# EAGLE board PIC32MX250F128B (EAGLE 5.12)
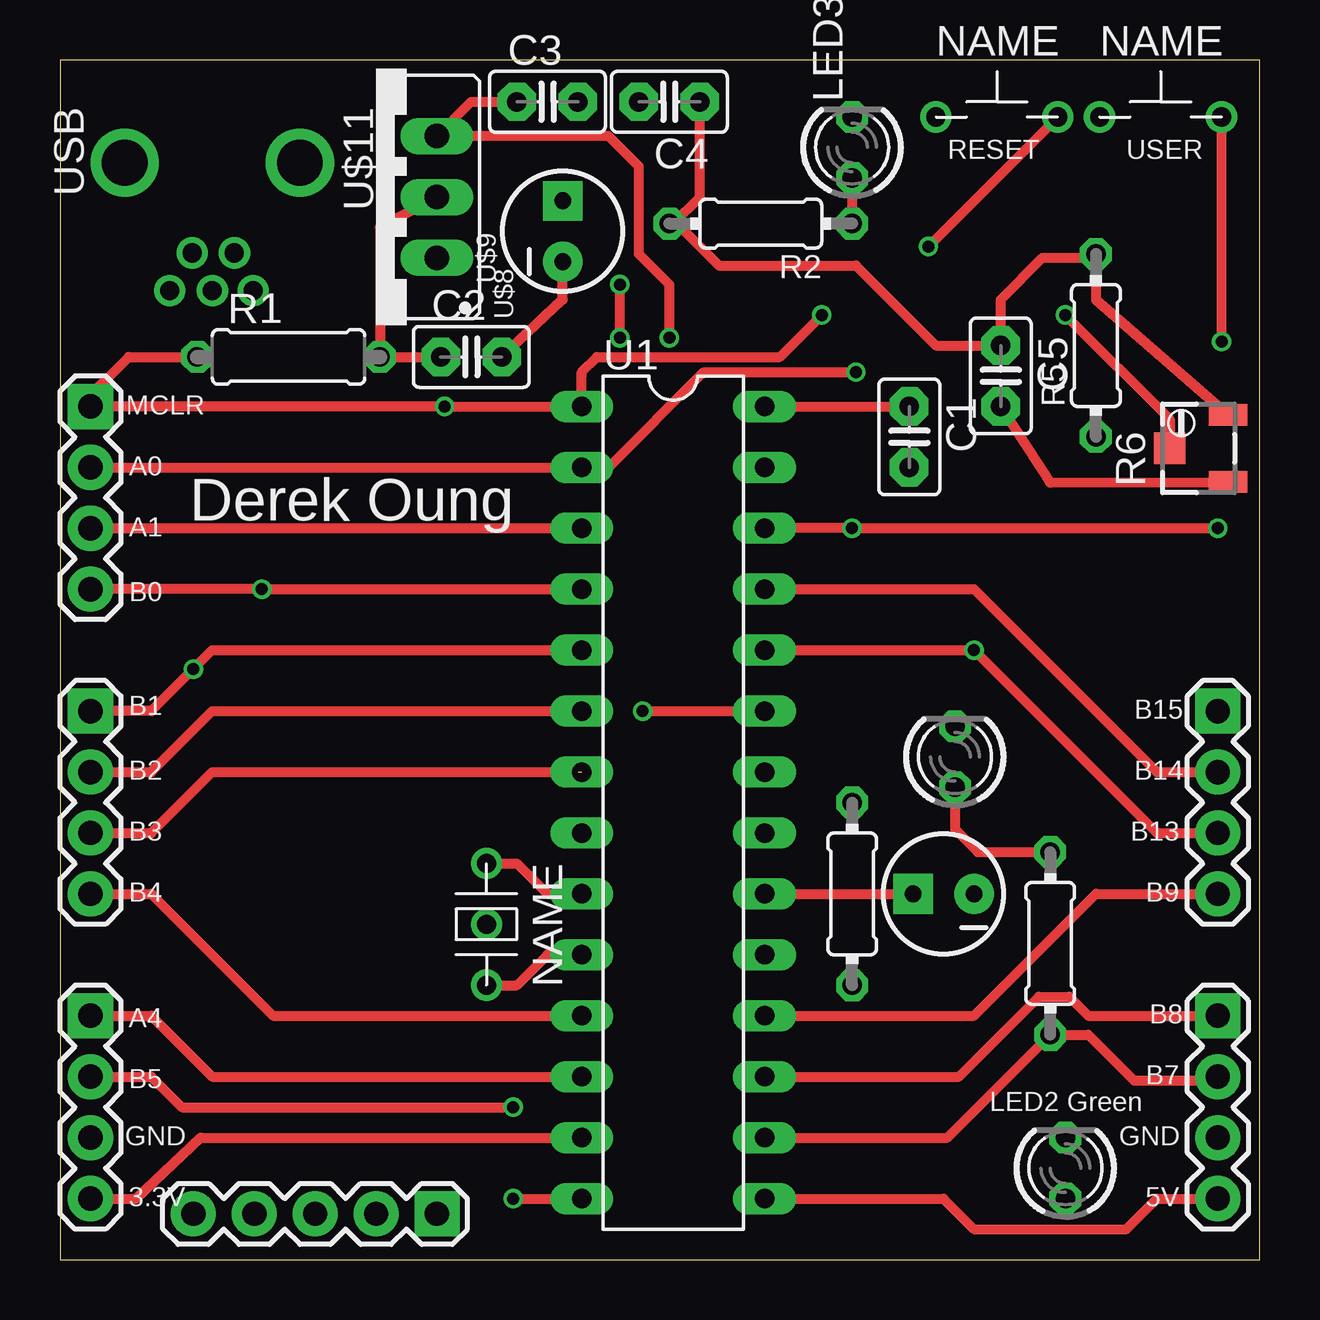
[diagram p0: board, top side]
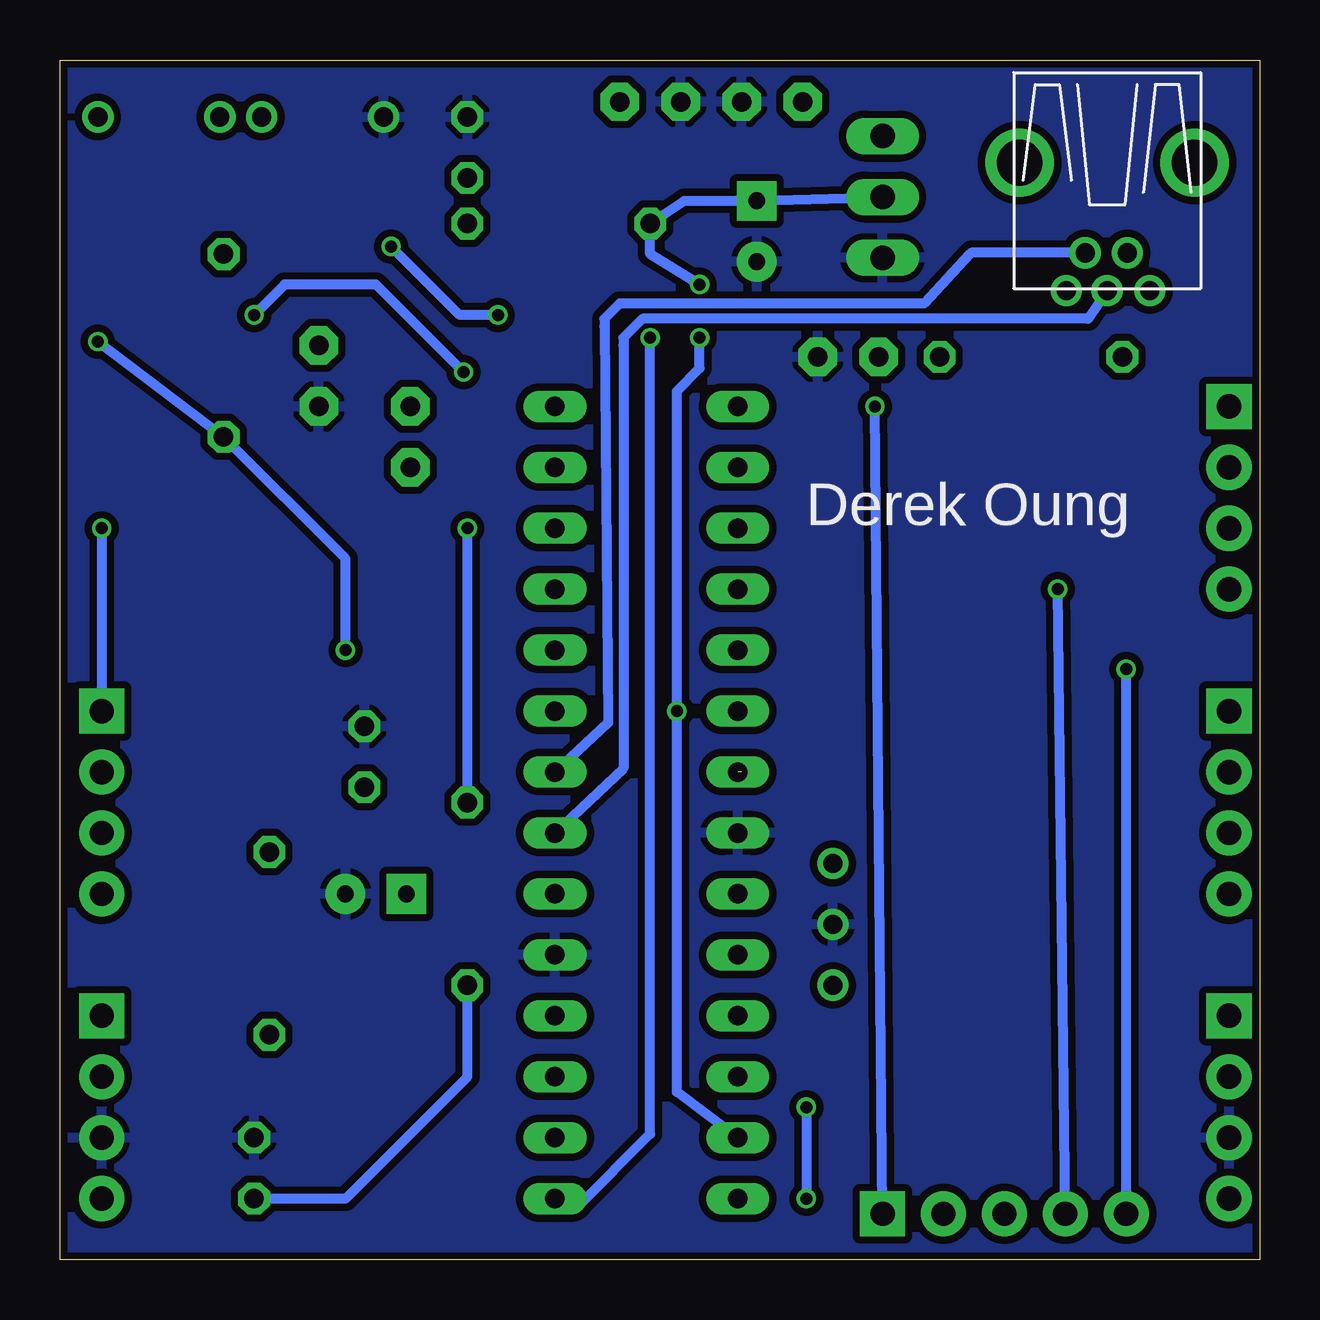
[diagram p1: board, bottom side, seen from below]

Size 50 x 50 mm. Coordinates in mm from the lower left corner, seen from the top.
Outline: 0,0 50,0 50,50 0,50 0,0
Copper layers (1*16): Top 0.035mm / dielectric 1.5mm / Bottom 0.035mm
Design rules "SeeedStudio_2layer_DRU_no_angle_20140221": minimum track width 6mil, minimum drill 12mil, track to track 6mil, track to pad 6mil, pad to pad 6mil, via to via 6mil, smd to smd 0mil, copper to edge 10mil, drill to drill 10mil, minimum pad ring 10mil, minimum via ring 6mil, stop-mask expansion 2mil, vias tented up to drill 100mil, thermal gap 10mil

## Footprints (pad centres in the part's own frame; a part is rotated, then mirrored left to right if it is on the bottom)
C2.5-2 = drill 0.813 pad 1.6 octagon: 1 -1.27,0; 2 1.27,0
LED3MM = drill 0.813 octagon: A -1.27,0; K 1.27,0
0207/7 = drill 0.813 octagon: 1 -3.81,0; 2 3.81,0
0204/7 = drill 0.813 octagon: 1 -3.81,0; 2 3.81,0
3223W = smd 0.9 x 1.6: 1 -1.4,-1.215; 3 1.4,-1.215 | smd 1.3 x 1.3: 2 0,1.215
DIL28-3 = drill 0.813 long: 1 -16.51,-3.81; 2 -13.97,-3.81; 3 -11.43,-3.81; 4 -8.89,-3.81; 5 -6.35,-3.81; 6 -3.81,-3.81; 7 -1.27,-3.81; 8 1.27,-3.81; 9 3.81,-3.81; 10 6.35,-3.81; 11 8.89,-3.81; 12 11.43,-3.81; 13 13.97,-3.81; 14 16.51,-3.81; 15 16.51,3.81; 16 13.97,3.81; 17 11.43,3.81; 18 8.89,3.81; 19 6.35,3.81; 20 3.81,3.81; 21 1.27,3.81; 22 -1.27,3.81; 23 -3.81,3.81; 24 -6.35,3.81; 25 -8.89,3.81; 26 -11.43,3.81; 27 -13.97,3.81; 28 -16.51,3.81
SWITCH = drill 0.8 round: P$1 -2.54,0; P$2 2.54,0
1X04 = drill 1.016 pad 1.88 square: 1 0,0 | drill 1.016 pad 1.88 round: 2 2.54,0; 3 5.08,0; 4 7.62,0
CAP_POL_D = drill 0.7 pad 1.651 square: 1 1.27,0 | drill 0.7 pad 1.651 round: 2 -1.27,0
1X05 = drill 1.016 pad 1.88 square: 1 0,0 | drill 1.016 pad 1.88 round: 2 2.54,0; 3 5.08,0; 4 7.62,0; 5 10.16,0
TO220 = drill 1.016 long: 1 -2.54,0; 2 0,0; 3 2.54,0
USB-MINIB = drill 0.8 round: D+ 4.064,0; D- 2.489,0.914; GND 4.064,-1.778; ID 2.489,-0.838; VBUS 4.064,1.702 | drill 1.9 round: P$6 -1.27,-3.65; P$7 -1.27,3.65
8MHZCRYSTALRESONATOR = drill 0.8 round: GND 0,0; P$1 -2.54,0; P$2 2.54,0

## Placement (x,y rotation side)
C1  0.1uF  [C2.5-2]  35.4,34.29 270 top
C2  0.1uF  [C2.5-2]  17.14,37.62 0 top
C3  0.1uF  [C2.5-2]  20.32,48.26 0 top
C4  0.1uF  [C2.5-2]  25.4,48.26 180 top
C5  0.1uF  [C2.5-2]  39.21,36.83 270 top
LED1  LED1 Yellow  [LED3MM]  37.31,20.95 90 top
LED2  Green  [LED3MM]  41.91,3.81 90 top
LED3  Red  [LED3MM]  33.02,46.35 90 top
R1  10k  [0207/7]  9.53,37.62 0 top
R2  330  [0204/7]  29.21,43.18 180 top
R3  R3 330  [0204/7]  33.02,15.24 90 top
R4  R4 330  [0204/7]  41.27,13.18 270 top
R5  10k  [0204/7]  43.18,38.1 90 top
R6  [3223W]  47.47,33.81 90 top
U1  PIC32MX250F128B  [DIL28-3]  25.56,19.05 270 top
U$2  SWITCH  [SWITCH]  39.05,47.62 0 top
U$3  SWITCH  [SWITCH]  45.88,47.62 0 top
U$4  1X04_HEADER  [1X04]  1.27,35.56 270 top
U$5  C1 10uF  [CAP_POL_D]  36.83,15.24 180 top
U$7  PICkit3  [1X05]  15.72,1.9 180 top
U$8  LD1117  [TO220]  15.72,44.29 90 top
U$9  10uF  [CAP_POL_D]  20.96,42.86 90 top
U$11  USB  [USB-MINIB]  6.35,44.45 270 top
U$13  1X04_HEADER  [1X04]  1.27,22.86 270 top
U$14  1X04_HEADER  [1X04]  1.27,10.16 270 top
U$15  1X04_HEADER  [1X04]  48.26,22.86 270 top
U$16  1X04_HEADER  [1X04]  48.26,10.16 270 top
U$17  8MHZCRYSTALRESONATOR  [8MHZCRYSTALRESONATOR]  17.78,13.97 270 top

## Library data of the parts
C1-C5 LED1-LED3 R1-R6 U1 U$2-U$5 U$7-U$9 U$11 U$13-U$17 = ME433

## Nets
3.3V: C2.1 C4.1 C5.1 R1.2 R2.2 R5.2 R6.3 U1.13 U1.23 U$8.2 U$9.1 U$14.4
5V: C3.1 U1.15 U$8.3 U$16.4
A0: R6.2 U1.2 U$4.2
A1: U1.3 U$4.3
A4: U1.12 U$14.1
B0: U1.4 U$4.4 U$7.4
B1: U1.5 U$7.5 U$13.1
B2: U1.6 U$13.2
B3: U1.7 U$13.3
B4: U1.11 U$13.4
B5: U1.14 U$14.2
B7: R4.2 U1.16 U$16.2
B8: U1.17 U$16.1
B9: U1.18 U$15.4
B13: R5.1 U1.24 U$3.P$2 U$15.3
B14: U1.25 U$15.2
B15: R3.2 U1.26 U$15.1
D+: U1.21 U$11.D+
D-: U1.22 U$11.D-
GND: C2.2 C3.2 C4.2 C5.2 LED1.K LED2.K LED3.K R6.1 U1.8 U1.19 U$2.P$1 U$5.2 U$8.1 U$9.2 U$14.3 U$16.3 U$17.GND
MCLR: R1.1 U1.1 U$2.P$2 U$4.1 U$7.1
N$1: LED3.A R2.1
N$3: U1.9 U$17.P$1
N$4: LED2.A R3.1
N$5: LED1.A R4.1
N$6: U$11.VBUS
N$7: U$11.GND
N$10: U1.10 U$17.P$2
N$14: C1.1 U1.28
N$16: C1.2
N$23: U1.20 U$5.1
N$28: U$7.2
N$29: U$7.3

## Tracks (layer width: path | path; a pad name or v marks a point on that pad's centre or on a via)
3.3V  (via drill 0.5)
  Top 0.406: U$14.4 3.17,2.54 5.87,5.08 U1.13 | C5.1 39.37,38.1 | C4.1 26.67,44.29 25.56,43.18 R2.2 25.72,43.18 27.46,41.43 33.18,41.43 36.51,38.1 C5.1 | R6.3 43.18,40.01 R5.2 43.02,41.75 40.96,41.75 39.21,40.01 C5.1 | C2.1 R1.2 13.34,43.02 U$8.2 | v24.29,22.86 U1.23 | v23.34,38.42 v23.34,40.64
  Bottom 0.406: U$8.2 U$9.1 23.97,44.13 R2.2 25.4,41.91 v23.34,40.64 | U1.13 24.29,6.99 v24.29,22.86 24.29,36.2 23.34,37.15 v23.34,38.42
5V  (via drill 0.5)
  Top 0.406: U1.15 36.83,2.54 38.1,1.27 44.45,1.27 45.72,2.54 U$16.4 | C3.1 17.14,48.26 U$8.3 22.86,46.83 24.13,45.56 24.13,41.91 25.4,40.64 v25.4,38.42
  Bottom 0.406: v25.4,38.42 25.4,5.24 28.42,2.22 28.57,2.22 28.89,2.54 U1.15
A0  (via drill 0.5)
  Top 0.406: U$4.2 U1.2 22.86,33.02 26.83,36.99 v33.18,36.99 | R6.2 46.25,35.03 v41.91,39.37
  Bottom 0.406: v41.91,39.37 40.64,40.64 36.83,40.64 v33.18,36.99
A1
  Top 0.406: U$4.3 U1.3
A4
  Top 0.406: U$14.1 3.81,10.16 6.35,7.62 U1.12
B0  (via drill 0.5)
  Top 0.406: U1.4 v8.41,27.94 U$4.4
  Bottom 0.406: U$7.4 v8.41,27.94
B1  (via drill 0.5)
  Top 0.406: U$13.1 3.81,22.86 v5.56,24.61 6.35,25.4 U1.5
  Bottom 0.406: U$7.5 v5.56,24.61
B2
  Top 0.406: U$13.2 3.81,20.32 6.35,22.86 U1.6
B3  (1 unrouted)
  Top 0.406: U$13.3 3.81,17.78 6.35,20.32 21.59,20.32
B4
  Top 0.406: U$13.4 3.81,15.24 8.89,10.16 U1.11
B5  (via drill 0.5)
  Top 0.406: U$14.2 3.81,7.62 5.08,6.35 v18.89,6.35 | v18.89,2.54 U1.14
  Bottom 0.406: v18.89,6.35 v18.89,2.54
B7
  Top 0.406: U1.16 36.99,5.08 R4.2 42.86,9.37 44.77,7.46 48.1,7.46 U$16.2
B8
  Top 0.406: U1.17 37.47,7.62 40.8,10.95 42.07,10.95 42.86,10.16 U$16.1
B9
  Top 0.406: U1.18 38.1,10.16 43.18,15.24 U$15.4
B13  (via drill 0.5)
  Top 0.406: U$15.3 45.72,17.78 v38.1,25.4 U1.24 | v48.42,38.26 U$3.P$2
  Bottom 0.406: v48.42,38.26 R5.1 38.1,29.21 v38.1,25.4
B14
  Top 0.406: U1.25 38.1,27.94 45.72,20.32 U$15.2
B15  (via drill 0.5)
  Top 0.406: v48.26,30.48 v33.02,30.48 U1.26
  Bottom 0.406: v48.26,30.48 U$15.1 | R3.2 v33.02,30.48
D+
  Bottom 0.406: U$11.D+ 7.14,39.21 25.72,39.21 26.51,38.42 26.51,38.1 26.51,20.48 U1.21
D-
  Bottom 0.406: U$11.D- 12.01,41.96 12.06,41.91 | 12.06,41.91 | 12.06,41.91 13.97,39.85 26.67,39.85 | 26.67,39.85 | U1.22 27.15,22.38 27.3,38.89 27.3,39.21 26.67,39.85
GND
  Top 0.406: C5.2 41.27,32.38 R6.1 | C2.2 20.95,40.01 U$9.2
  pour Bottom (isolate 0.305): 0.16,50.01 0,50.01 0,-0.32 49.85,-0.32 49.85,0 49.85,49.69 50.01,49.85 0.32,49.85
MCLR  (via drill 0.5)
  Top 0.406: R1.1 2.86,37.62 1.27,36.04 U$4.1 v16.03,35.56 U1.1 21.75,36.83 | R1.1 | 21.75,36.83 | v36.2,42.23 U$2.P$2 | v31.75,39.37 30,37.62 22.38,37.62 21.75,36.99 21.75,36.83
  Bottom 0.406: U$7.1 v16.03,35.56 | v36.2,42.23 33.34,39.37 v31.75,39.37
N$1
  Top 0.406: LED3.A | LED3.A R2.1
N$3
  Top 0.406: U$17.P$1 19.05,16.51 20.32,15.24 U1.9
N$4
  Bottom 0.406: R3.1 33.02,7.62 38.1,2.54 LED2.A
N$5
  Top 0.406: LED1.A 37.31,17.94 38.26,16.99 R4.1
N$10
  Top 0.406: U$17.P$2 19.05,11.43 20.32,12.7 U1.10
N$14
  Top 0.406: U1.28 C1.1
N$23
  Top 0.406: U1.20 U$5.1

## Text on the board
tPlace: RESET | USER | MCLR | A0 | A1 | Derek Oung | B0 | B1 | B15 | B2 | B14 | B3 | B13 | B4 | B9 | A4 | B8 | B5 | B7 | LED2 Green | GND | GND | 3.3V | 5V
bPlace: Derek Oung